# Altium PCB ws_pcb.PcbDoc
Units mm, origin at the board's own origin, x right, y up, seen from the top; angles counter-clockwise.
Board outline 62.23 x 54.61 mm, 2 copper layers (Top Layer, Bottom Layer); 27 components, 18 nets, 124 pads, 18 vias.
Unrouted connection lines stored in the file: 26.
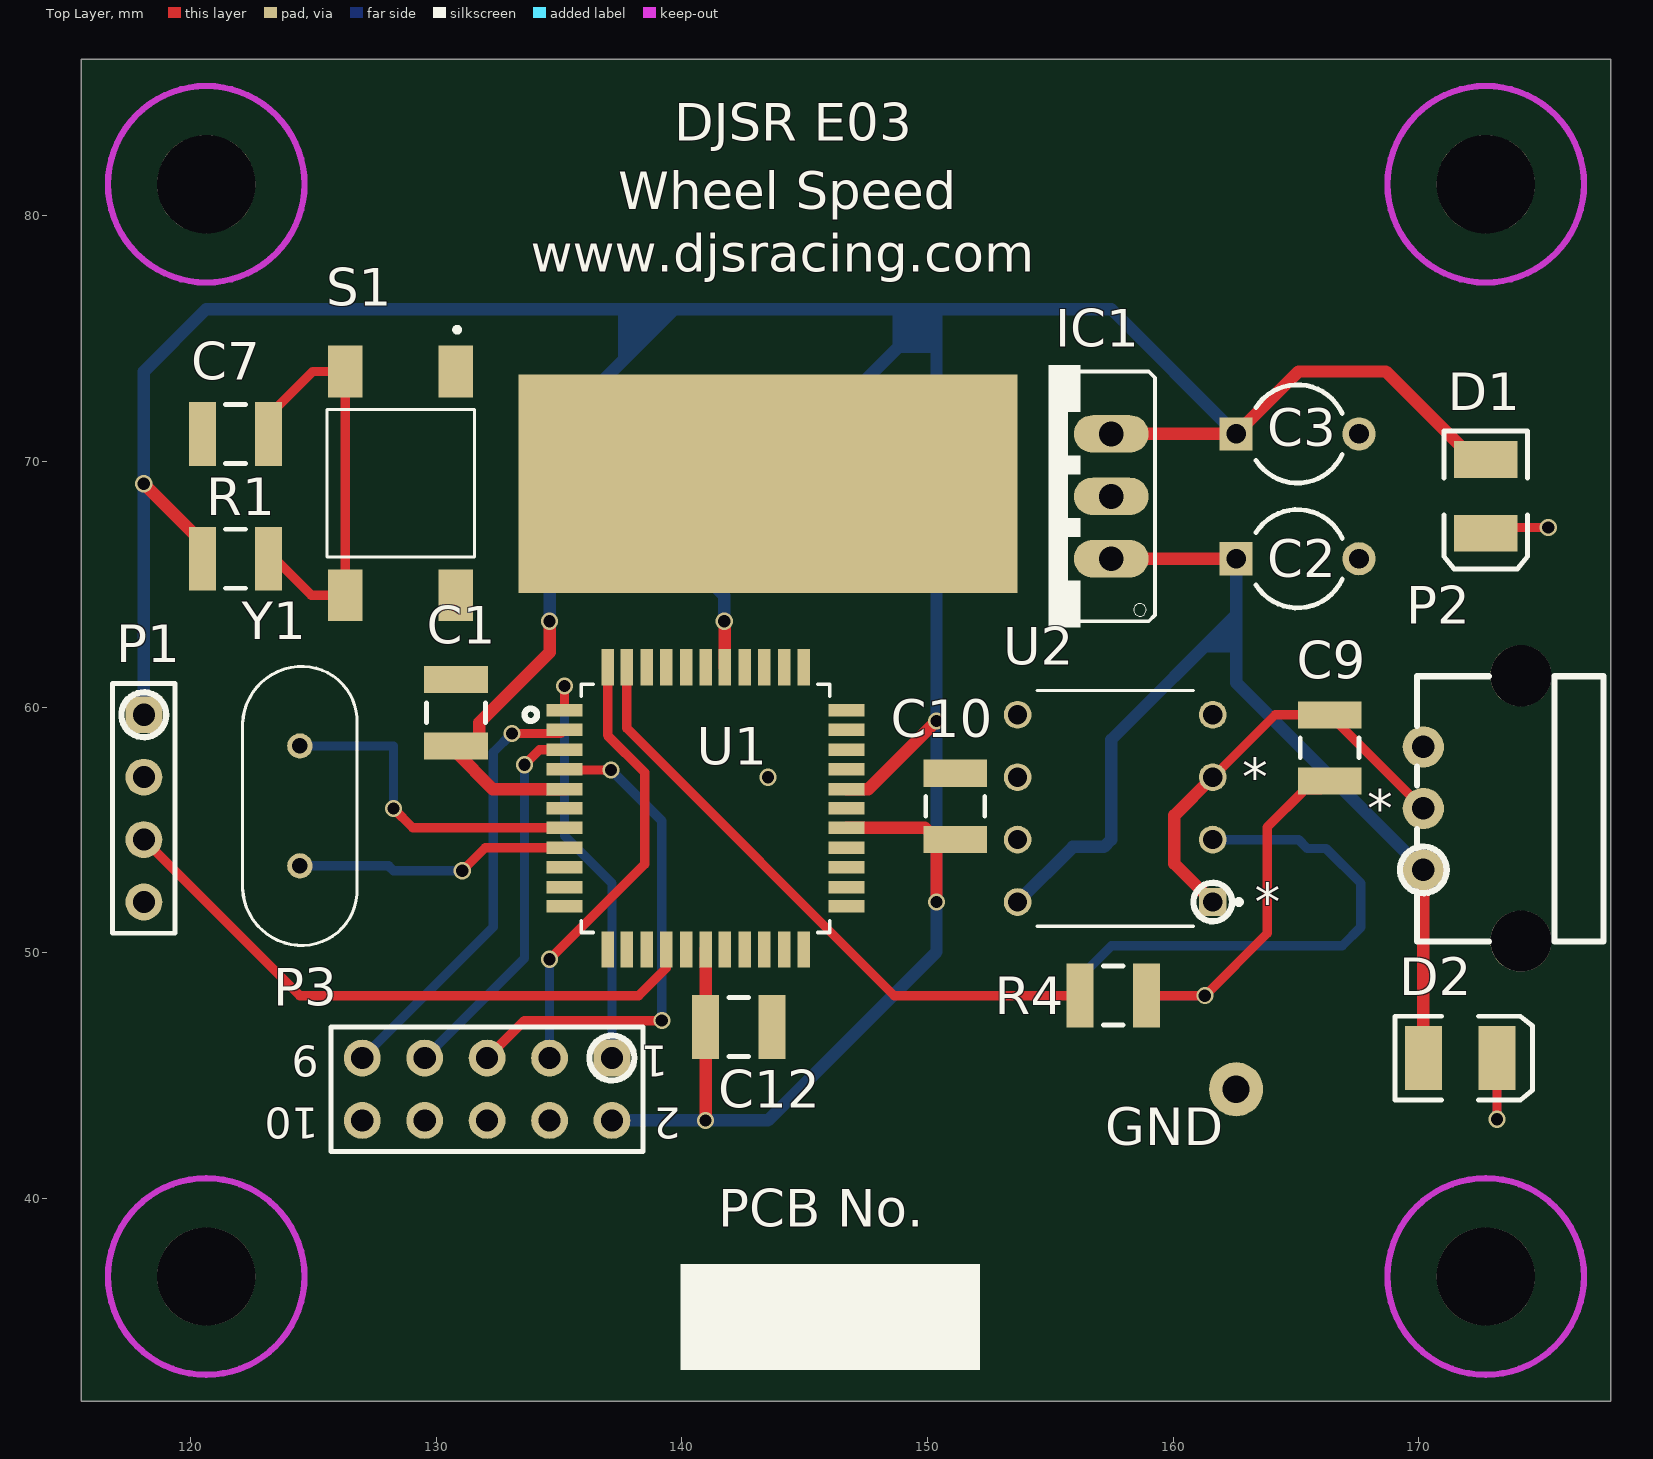
[diagram p0: Top Layer view]
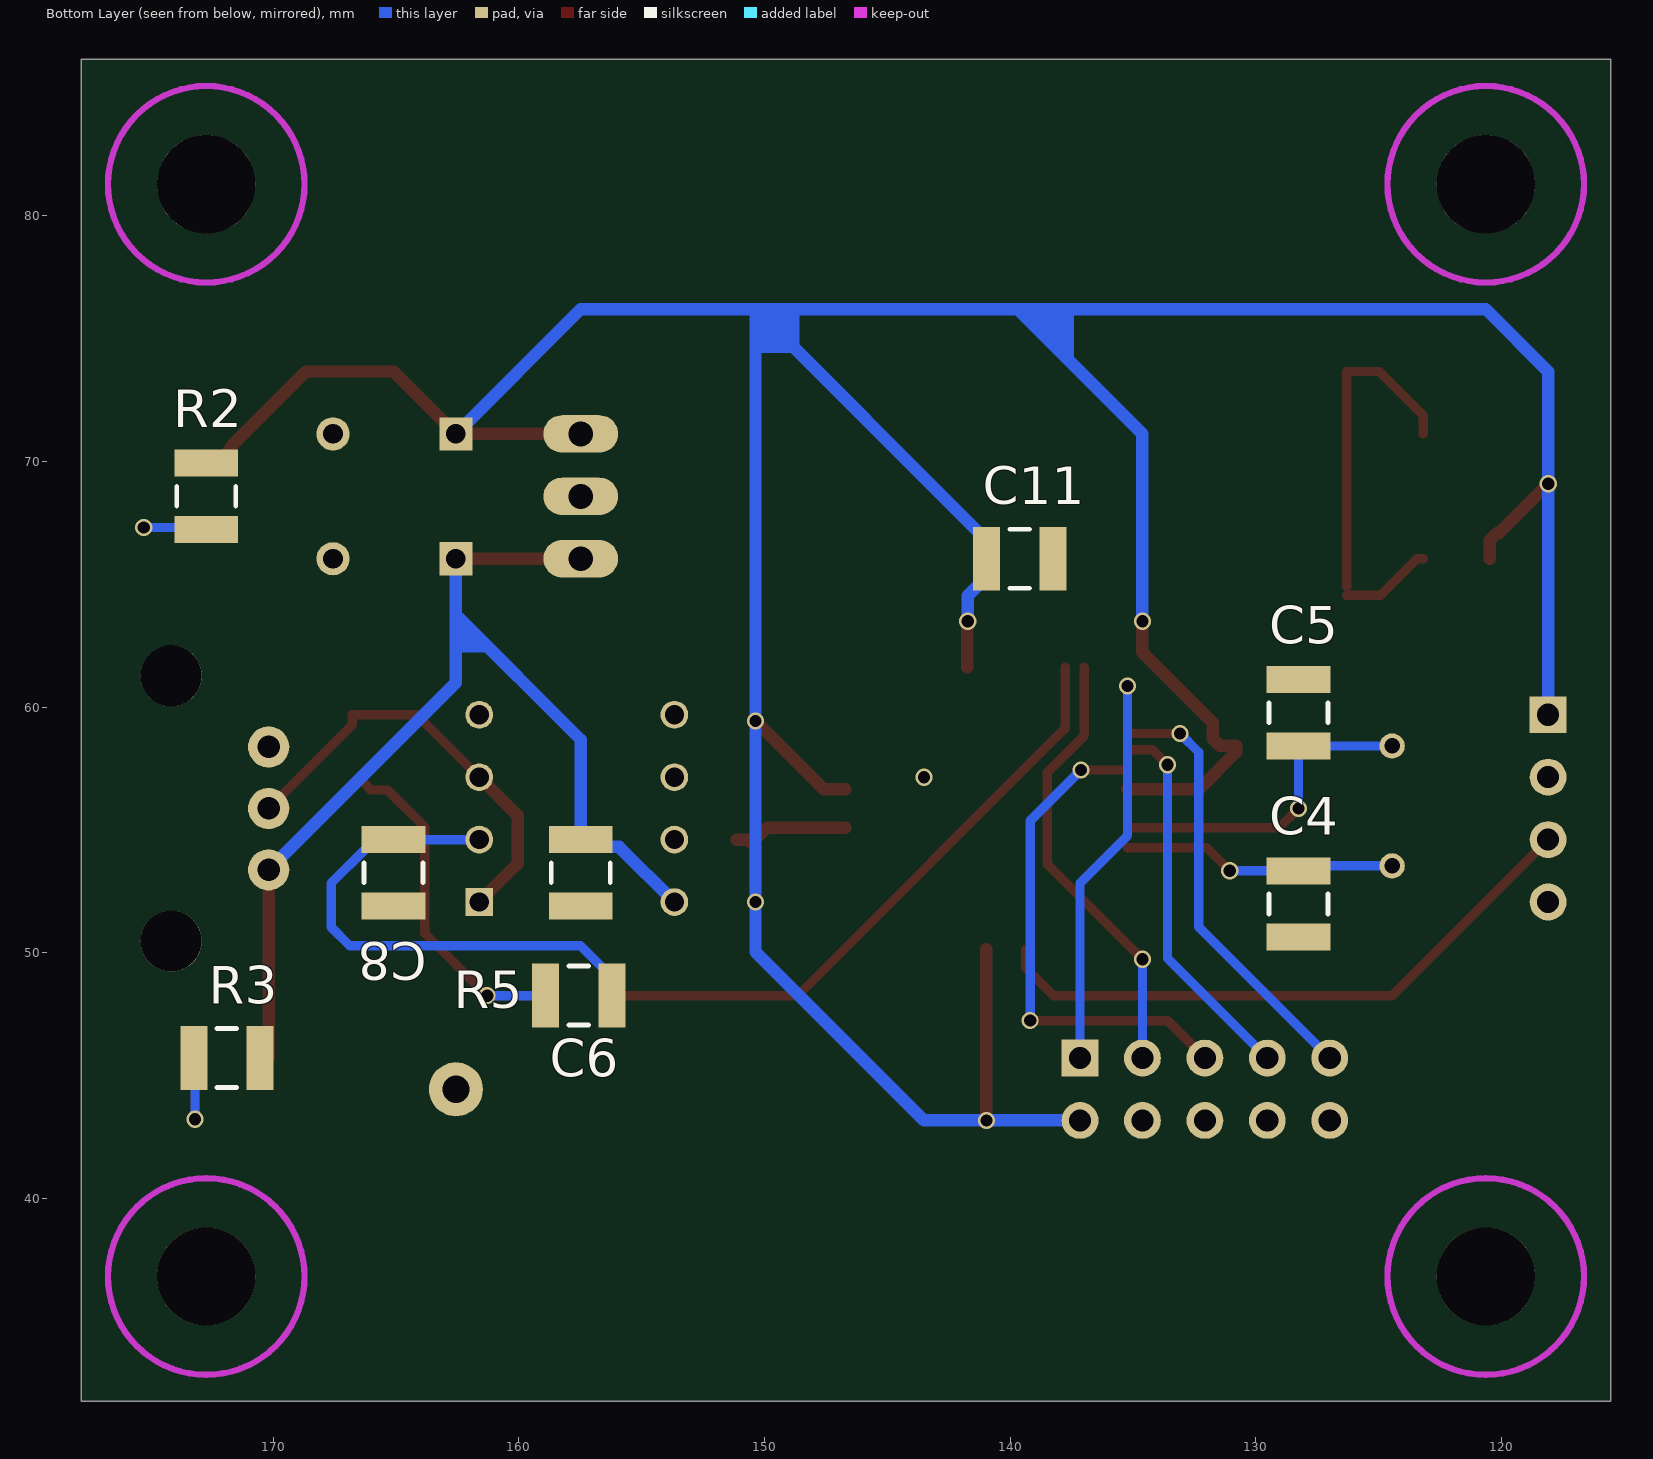
[diagram p1: Bottom Layer view, seen from below]

## Layer stack, top to bottom
Top Solder: solder mask 0.0102, Solder Resist, Dk 3.5
Top Layer: signal copper 0.0356
Dielectric 1: dielectric 0.32, FR-4, Dk 4.8
Bottom Layer: signal copper 0.0356
Bottom Solder: solder mask 0.0102, Solder Resist, Dk 3.5

## Board outline
115.57,86.36 115.57,31.75 177.8,31.75 177.8,86.36

## Design rules (kind name [scope] priority, off if disabled: settings)
Clearance [All] p1: gap=0.2 ignorepadtopadclearanceinfootprint=FALSE except(0.127: SMDPad-SMDPad; 0.254: Arc-Via Arc-Hole Track-Via Track-Hole Via-Via; 0.33: Arc-THPad Track-THPad; 0.54: THPad-THPad)
PolygonConnect [All] p1: connectstyle=Relief reliefconductorwidth=0.254 reliefentries=4 polygonreliefangle="90 Angle" airgapwidth=0.254
RoutingVias [All] p1: holewidth=0.5 width=0.7 viastyle="Through Hole" minholewidth=0.5 minwidth=0.65 maxholewidth=6.3 maxwidth=6.3
SolderMaskExpansion [All] p1: expansion=0.102 istentingtop=FALSE
Width [All] p1: maxlimit=0.508 minlimit=0.381 preferedwidth=0.381
30 further rules are at their usual default settings.

## Components (designator, comment, footprint, x,y, rotation, side; value= is the part's Value field where it differs from the comment)
C1 "Cap Semi" C1210 130.81,59.77 r270 top value=100pF
C2 "Cap2" CAPR5-4X5 165.06,66.04 r0 top value=100pF
C3 "Cap2" CAPR5-4X5 165.06,71.12 r0 top value=100pF
C4 "Cap Semi" C1210 128.27,51.99 r90 bottom value=22p
C5 "Cap Semi" C1210 128.27,59.77 r270 bottom value=22pF
C6 "Cap Semi" C1210 157.48,53.26 r90 bottom value=100pF
C7 "Cap Semi" C1210 121.84,71.12 r180 top value=100pF
C8 "Cap Semi" C1210 165.1,53.26 r90 bottom value=100pF
C9 "Cap Semi" C1210 166.37,58.34 r90 top value=100pF
C10 "Cap Semi" C1210 151.13,55.96 r270 top value=100pF
C11 "Cap Semi" C1210 139.62,66.04 r0 bottom value=100pF
C12 "Cap Semi" C1210 142.32,46.99 r180 top value=100pF
D1 "LED3" 3.5X2.8X1.9 172.72,68.58 r270 top
D2 "LED3" 3.5X2.8X1.9 171.68,45.72 r0 top
IC1 "L7805" 78XXS 154.94,68.58 r90 top
P1 "Header 4" HDR1X4 118.11,59.69 r270 top
P2 "SS-Header 3" PCBComponent_1 170.18,53.38 r180 top
P3 "Header 5X2" HDR2X5 137.16,45.72 r180 top
R1 "Res3" 14-1210 121.84,66.04 r180 top value=1K
R2 "Res3" 14-1210 172.72,68.58 r270 bottom value=1K
R3 "Res3" 14-1210 171.878,45.72 r0 bottom value=1K
R4 "Res3" 14-1210 157.56,48.26 r0 top value=1K
R5 "Res3" 14-1210 157.56,48.26 r180 bottom value=1K
S1 "5-1437565-0" SW_5-1437565-0 128.56,69.11 r270 top
U1 "ATMEGA32A-AU" QFP80P1200X1200X120-44N 140.97,55.88 r0 top
U2 "LM358AP" DIP794W45P254L959H508Q8 157.64,55.88 r180 top
Y1 "XTAL" XTAL_ECS-200-20-1X 124.46,55.98 r90 top

## Footprints (in the part's own frame and the unit in brackets; to place one, negate y for a bottom-side part, rotate by r counter-clockwise, add the part's x,y. Pads: shape width x height; smd on the part's side, far side on the other; paste and mask are expansions set on the pad)
3.5X2.8X1.9 [mm] "SM LED; 2 C-Bend Leads; Body 3.5 x 2.8 x 1.9 mm, inc leads (LxWxH typ)"
  rect 1.5x2.6 smd: 1(-1.5,0) 2(1.5,0)
  silkscreen extent -2.65,-1.7 2.95,1.7
14-1210 [mm] "Chip Resistor, Body 3.2x2.5mm, IPC High Density"
  rect 1.1x2.6 smd: 1(-1.35,0) 2(1.35,0)
  silkscreen extent -0.4,-1.2 0.4,1.2, body extent -1.68,-1.32 1.68,1.32, height 0.9
78XXS [mil]
  oval 60x120 hole 40: GND(0,-100) IN(-100,-100) OUT(100,-100)
  silkscreen extent -210,-170 210,0
C1210 [mm] "Chip Capacitor, Body 3.2x2.5mm, IPC High Density"
  rect 1.1x2.6 smd: 1(-1.35,0) 2(1.35,0)
  silkscreen extent -0.4,-1.2 0.4,1.2, body extent -1.7,-1.35 1.7,1.35, height 1.3
CAPR5-4X5 [mm] "Capacitor; 2 Leads"
  rect 1.35x1.35 hole 0.8: 1(-2.5,0)
  round 1.35 hole 0.8: 2(2.5,0)
  silkscreen extent -1.69,-2 1.82,2
DIP794W45P254L959H508Q8 [mm]
  rect 1.13x1.13 hole 0.78: 1(-3.97,3.81)
  round 1.13 hole 0.78: 2(-3.97,1.27) 3(-3.97,-1.27) 4(-3.97,-3.81) 5(3.97,-3.81) 6(3.97,-1.27) 7(3.97,1.27) 8(3.97,3.81)
  silkscreen extent -5.13,-4.79 3.18,4.79
HDR1X4 [mm] "Connector; Header; 4 Position"
  rect 1.5x1.5 hole 0.9: 1(0,0)
  round 1.5 hole 0.9: 2(2.54,0) 3(5.08,0) 4(7.62,0)
  silkscreen extent -1.27,-1.27 8.89,1.27
HDR2X5 [mm] "Connector; Header; 5x2 Position"
  rect 1.5x1.5 hole 0.9: 1(0,0)
  round 1.5 hole 0.9: 2(0,2.54) 3(2.54,0) 4(2.54,2.54) 5(5.08,0) 6(5.08,2.54) 7(7.62,0) 8(7.62,2.54) 9(10.16,0) 10(10.16,2.54)
  silkscreen extent -1.27,-1.27 11.43,3.81
PCBComponent_1 [mil]
  round 66 hole 36: 1(0,0) 2(0,-98.43) 3(0,-196.85)
  round 98 hole 98: 4(-156.3,-311.02) 5(-156.3,114.17)
  silkscreen extent -289,-310 10,115
QFP80P1200X1200X120-44N [mil]
  rect 58x20 smd: 1(-226,157) 2(-226,126) 3(-226,94) 4(-226,63) 5(-226,31) 6(-226,0) 7(-226,-31) 8(-226,-63) 9(-226,-94) 10(-226,-126) 11(-226,-157) 23(226,-157) 24(226,-126) 25(226,-94) 26(226,-63) 27(226,-31) 28(226,0) 29(226,31) 30(226,63) 31(226,94) 32(226,126) 33(226,157)
  rect 20x58 smd: 12(-157,-226) 13(-126,-226) 14(-94,-226) 15(-63,-226) 16(-31,-226) 17(0,-226) 18(31,-226) 19(63,-226) 20(94,-226) 21(126,-226) 22(157,-226) 34(157,226) 35(126,226) 36(94,226) 37(63,226) 38(31,226) 39(0,226) 40(-31,226) 41(-63,226) 42(-94,226) 43(-126,226) 44(-157,226)
  silkscreen extent -199,-199 199,199
SW_5-1437565-0 [mm]
  rect 2.1x1.4 smd: 1(-4.55,2.25) 2(4.55,2.25) 3(-4.55,-2.25) 4(4.55,-2.25)
  silkscreen extent -6.35,-3 3,3
XTAL_ECS-200-20-1X [mm]
  round 1.03 hole 0.63: 1(-2.44,0) 2(2.44,0)
  silkscreen extent -5.68,-2.33 5.68,2.33

## Part data
C1 C4 C5 C6 C7 C8 C9 C10 C11 C12: "Capacitor (Semiconductor SIM Model)", LatestRevisionDate=29-May-2009, LatestRevisionNote="IPC-7351 Footprint Added.", PackageDescription="Chip Capacitor", PackageReference=C1206, Published=8-Jun-2000, Publisher="Altium Limited"
C2 C3: "Capacitor", PackageDescription="Capacitor; 2 Leads", PackageReference=CAPR5-4X5, Published=23-Sep-2002, Publisher="Altium Limited"
D1 D2: "Typical BLUE SiC LED", DatasheetVersion=16-Apr-2002, LatestRevisionDate=17-Dec-2003, LatestRevisionNote="PCB Footprint replaced.", PackageDescription="SM LED; 2 C-Bend Leads; Body 3.5 x 2.8 x 1.9 mm, inc leads (LxWxH typ)", PackageReference=3.5X2.8X1.9, PackageVersion=16-Apr-2002, Published=8-Jun-2000, Publisher="Altium Limited"
IC1: "Linear Voltage Regulator IC 1 Output 1.5A D2PAK", Package="TO-263-3 Inchange Semiconductor", Availability=Unavailable, MF=STMicroelectronics, MP=L7805, Price=None, SnapEDA_Link=https://www.snapeda.com/parts/L7805/STMicroelectronics/view-part/563125/?ref=snap
P1: "Header, 4-Pin", LatestRevisionDate=17-Jul-2002, LatestRevisionNote="Re-released for DXP Platform.", Publisher="Altium Limited"
P2: library part Component_1, "Slimseal 3-Pin Connector"
P3: "Header, 5-Pin, Dual row", LatestRevisionDate=17-Jul-2002, LatestRevisionNote="Re-released for DXP Platform.", Publisher="Altium Limited"
R1 R2 R3 R4 R5: "Resistor", LatestRevisionDate=29-May-2009, LatestRevisionNote="IPC-7351 Footprint Added.", PackageDescription="Chip Resistor", PackageReference=J1-0603, Published=8-Jun-2000, Publisher="Altium Limited"
S1: "Tactile Switch SPST-NO Top Actuated Surface Mount", Package=None, Availability=Unavailable, EU_RoHS_Compliance=Compliant, MF="TE Connectivity", MP=5-1437565-0, Price=None, SnapEDA_Link=https://www.snapeda.com/parts/5-1437565-0/TE%20Connectivity%20ALCOSWITCH%20Switches/view-part/227152/?ref=snap, TE_purchase_URL=https://www.te.com/usa-en/product-5-1437565-0.html?te_bu=Cor&te_type=disp&te_campaign=seda_glo_cor-seda-global-disp-prtnr-fy19-seda-model-bom-cta_sma-317_1&elqCampaignId=32493
U1: "AVR AVRÂ® ATmega Microcontroller IC 8-Bit 16MHz 32KB _16K x 16_ FLASH 44-TQFP _10x10_", Package="TQFP-44 Microchip", Availability=Unavailable, MF=Microchip, MP=ATMEGA32A-AU, Price=None, SnapEDA_Link=https://www.snapeda.com/parts/ATMEGA32A-AU/Microchip/view-part/666512/?ref=snap
U2: "Dual improved offset, standard operational amplifier<br /> &nbsp; 8-PDIP 0 to 70", Package="PDIP-8 Texas Instruments", Availability=Unavailable, BuyPart=https://www.snapeda.com/parts/LM358AP/Texas%20Instruments/view-part/214423/?ref=eda, MF="Texas Instruments", MP=LM358AP, Price=None, SnapEDA_Link=https://www.snapeda.com/parts/LM358AP/Texas%20Instruments/view-part/214423/?ref=snap, Texas_Instruments-Purchase-URL=https://snapeda.com/shop?store=Texas+Instruments&id=214423
Y1: library part ECS-240.0001-18-1X, "Crystals / Oscillators / Resonators 24.00014MHz 18pF", Package="HC49/U ECS International", Availability=Unavailable, MF="ECS International", MP=ECS-240.0001-18-1X, Price=None, SnapEDA_Link=https://www.snapeda.com/parts/ECS-240.0001-18-1X/ECS%20International/view-part/259232/?ref=snap

## Free pads (board coordinates)
  round 2.2 hole 1.1: 2(162.56,44.45)
  round 4 hole 4: 3(120.65,81.28) 4(172.72,81.28) 6(120.65,36.83) 7(172.72,36.83)
  rect 20.32x8.89 smd: 5(143.51,69.088)

## Via types
v1: diameter 0.7, hole 0.5, Top Layer to Bottom Layer, 18 vias

## Nets (pads, with @x,y where several pads share a name; then routed paths per layer and width w, separated by ;. In a path a pad name is that pad's centre, name@x,y a point inside that pad or via, vN(x,y) a via of type N, cw(c..) or ccw(c..) an arc to the next point about the centre after c; other vN are vias at no path point)
+5: C1.2 C3.1 C10.2 C11.2 C12.2 D1.1 IC1.OUT P1.1 P3.2 R1.2 U1.5 U1.17 U1.27 U1.29 U1.38 | length 190.7
  Top Layer w0.508: v1(118.11,69.088) 120.112,67.086 120.194,67.086 120.49,66.79 R1.2 ; v1(134.62,63.5) 134.62,62.23 131.766,59.376 131.766,58.716 131.47,58.42 C1.2 130.81,58.166 132.309,56.667 U1.5 ; v1(140.97,43.18) C12.2 U1.17 ; v1(141.732,63.5) 141.757,63.475 U1.38 ; U1.27 149.897,55.093 150.38,54.61 C10.2@150.664,54.61 ; U1.29 147.599,56.667 v1(150.368,59.436) ; v1(150.368,52.07) 150.368,54.314 C10.2@150.664,54.61 ; C10.2 C10.2@150.664,54.61 ; IC1.OUT C3.1 165.1,73.66 168.656,73.66 171.674,70.642 171.674,70.576 172.17,70.08 D1.1
  Bottom Layer w0.508: P1.1 v1(118.11,69.088) 118.11,73.66 120.65,76.2 139.7,76.2 ; v1(134.62,63.5) 134.62,71.12 139.7,76.2 ; P3.2 v1(140.97,43.18) 143.51,43.18 150.368,50.038 v1(150.368,52.07) v1(150.368,59.436) 150.368,76.2 ; v1(141.732,63.5) 141.732,64.528 140.97,65.29 C11.2 141.266,66.336 141.266,67.098 150.368,76.2 ; C3.1 157.48,76.2 150.368,76.2 ; 139.7,76.2 150.368,76.2
+12: C2.1 C6.2 D2.1 IC1.IN P2.1 U2.8 | length 44.7
  Top Layer w0.508: IC1.IN C2.1 ; D2.1 P2.1
  Bottom Layer w0.508: U2.8 155.914,54.314 157.184,54.314 C6.2 157.48,58.674 162.56,63.754 ; C2.1 162.56,63.754 ; P2.1 162.56,61 162.56,63.754
Aoutput: C9.2 P2.2 U2.1 U2.3 | length 17.8
  Top Layer w0.381: U2.3 164.15,59.69 C9.2 166.772,59.69 166.772,59.288 P2.2
  Top Layer w0.508: U2.1 160.053,53.627 160.053,55.593 U2.3
digitalOutput: P1.3 U1.15 | length 25.1
  Top Layer w0.381: P1.3 124.46,48.26 138.246,48.26 139.37,49.384 U1.15
GND: C1.1 C2.2 C3.2 C4.1 C5.1 C6.1 C7.2 C8.1 C10.1 C11.1 C12.1 IC1.GND P1.2 P2.3 P3.10 pad.2 pad.5 R2.1 R3.1 S1.1 S1.2 U1.6 U1.18 U1.28 U1.39 U2.4
  other v1: 143.51,57.15
MISO: P3.9 U1.2 | length 17.9
  Top Layer w0.381: v1(133.096,58.928) 135.077,58.928 U1.2
  Bottom Layer w0.381: P3.9 132.334,51.054 132.334,58.166 v1(133.096,58.928)
MOSI: P3.1 U1.1 | length 16.9
  Top Layer w0.381: U1.1 v1(135.23,60.858)
  Bottom Layer w0.381: v1(135.23,60.858) 135.23,54.762 137.16,52.832 P3.1
NetC8_2: C8.2 R5.2 U2.2 | length 21.6
  Bottom Layer w0.381: R5.2 156.21,49.01 157.492,50.292 166.878,50.292 167.64,51.054 167.64,52.832 166.222,54.25 165.46,54.25 C8.2 U2.2
NetC9_1: C9.1 R4.2 R5.1 | length 16.4
  Top Layer w0.381: R4.2@158.75,48.1 R4.2 v1(161.29,48.26) 163.83,50.8 163.83,55.118 165.342,56.63 166.01,56.63 C9.1
  Bottom Layer w0.381: R5.1@158.75,48.1 R5.1 v1(161.29,48.26)
NetD1_2: D1.2 R2.2 | length 5.2
  Top Layer w0.381: D1.2 172.95,67.31 v1(175.26,67.31)
  Bottom Layer w0.381: R2.2 172.8,67.31 v1(175.26,67.31)
NetD2_2: D2.2 R3.2 | length 5
  Top Layer w0.381: v1(173.18,43.228) D2.2
  Bottom Layer w0.381: v1(173.18,43.228) 173.18,45.672 R3.2
PWM: R4.1 U1.43 | length 25.4
  Top Layer w0.381: U1.43 137.77,59.14 148.65,48.26 R4.1
Reset: C7.1 R1.1 S1.3 S1.4 | length 17.1
  Top Layer w0.381: R1.1 123.444,66.04 124.924,64.56 S1.4 ; C7.1 123.19,71.87 124.98,73.66 S1.3 S1.4@126.31,64.91
RST: P3.5 U1.4 | length 20.7
  Top Layer w0.381: P3.5 133.604,47.244 v1(139.192,47.244) ; U1.4 135.268,57.442 v1(137.122,57.442)
  Bottom Layer w0.381: v1(137.122,57.442) 139.192,55.372 v1(139.192,47.244)
SCK: P3.7 U1.3 | length 15.5
  Top Layer w0.381: v1(133.604,57.658) 134.214,58.268 U1.3
  Bottom Layer w0.381: P3.7 133.604,49.784 v1(133.604,57.658)
SS: P3.3 U1.44 | length 18.1
  Top Layer w0.381: v1(134.62,49.74) 138.493,53.613 138.493,57.34 136.982,58.852 U1.44
  Bottom Layer w0.381: P3.3 v1(134.62,49.74)
XTAL1: C4.2 U1.8 Y1.1 | length 11.2
  Top Layer w0.381: v1(131.064,53.34) 132.004,54.28 U1.8
  Bottom Layer w0.381: Y1.1 128.07,53.54 C4.2 v1(131.064,53.34)
XTAL2: C5.2 U1.7 Y1.2 | length 13.6
  Top Layer w0.381: v1(128.27,55.88) 129.057,55.093 U1.7
  Bottom Layer w0.381: Y1.2 C5.2 v1(128.27,55.88)
pads on no net: P1.4 P2.4 P2.5 P3.4 P3.6 P3.8 U1.9 U1.10 U1.11 U1.12 U1.13 U1.14 U1.16 U1.19 U1.20 U1.21 U1.22 U1.23 U1.24 U1.25 U1.26 U1.30 U1.31 U1.32 U1.33 U1.34 U1.35 U1.36 U1.37 U1.40 U1.41 U1.42 U2.5 U2.6 U2.7

## Keep-outs
Keep-Out Layer:
  circle w0.254: c172.72,36.83 r4
  circle w0.254: c120.65,36.83 r4
  circle w0.254: c172.72,81.28 r4
  circle w0.254: c120.65,81.28 r4

## Other copper
Bottom Layer:
  region net +12: 162.56,63.5 162.56,62.23 161.036,62.23
  region net +5: 150.368,76.2 150.368,74.422 148.59,74.422 148.59,76.2
  region net +5: 150.368,76.2
  region net +5: 139.446,76.2 137.414,76.2 137.414,73.914

## Silkscreen, mask and mechanical layers (free items; w line width, h text height)
Top Overlay:
  circle w0.254: c137.16,45.72 r0.916
  circle w0.254: c170.18,53.38 r0.949
  circle w0.254: c161.61,52.07 r0.785
  circle w0.254: c118.11,59.69 r0.916
  circle w0.254: c133.858,59.69 r0.254
  rectangle: 139.954,33.02 152.146,37.338
  text "DJSR E03" at 139.7,83.058 h1.52
  text "Wheel Speed" at 137.414,80.264 h1.52
  text "www.djsracing.com" at 133.858,77.724 h1.52
  text "*" at 162.814,56.388 h1.52
  text "*" at 167.894,55.118 h1.52
  text "*" at 163.322,51.308 h1.52
  text "GND" at 157.226,42.164 h1.52
  text "PCB No." at 141.478,38.862 h1.52

## Text inside footprints (layer, text, board x,y; h text height)
IC1: Mechanical 13 "O" at 158.753,70.486 h1.27 r90; Mechanical 13 "I" at 158.755,65.401 h1.27 r90; Mechanical 13 "-" at 158.752,67.945 h1.27 r90
P3: Top Overlay "2" at 139.954,43.688 h1.27 r180; Top Overlay "1" at 139.446,46.228 h1.27 r180; Top Overlay "9" at 125.222,46.228 h1.27 r180; Top Overlay "10" at 125.222,43.688 h1.27 r180